# Altium PCB MainPCB.PcbDoc
Units mil, origin at the board's own origin, x right, y up, seen from the top; angles counter-clockwise.
Board outline 4810 x 6680 mil, 2 copper layers (Top Layer, Bottom Layer); 78 components, 77 nets, 281 pads, 54 vias.
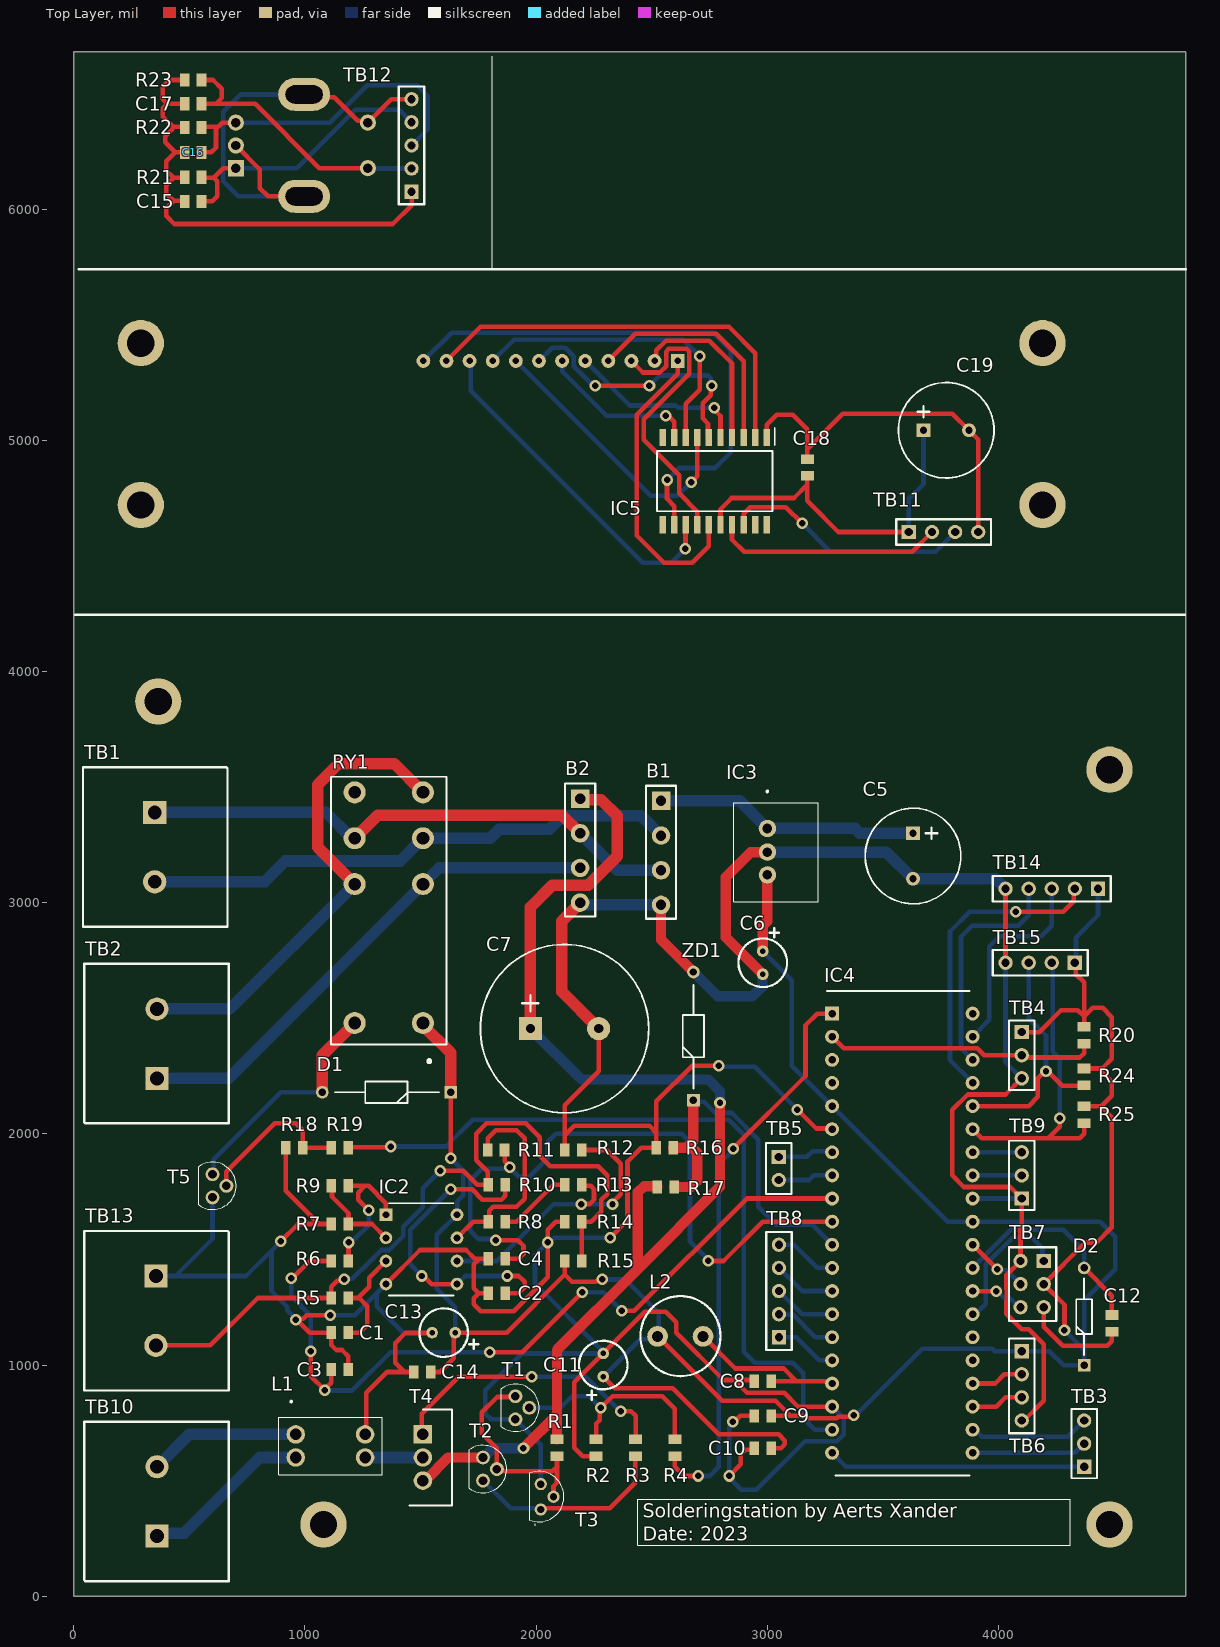
[diagram p0: Top Layer view]
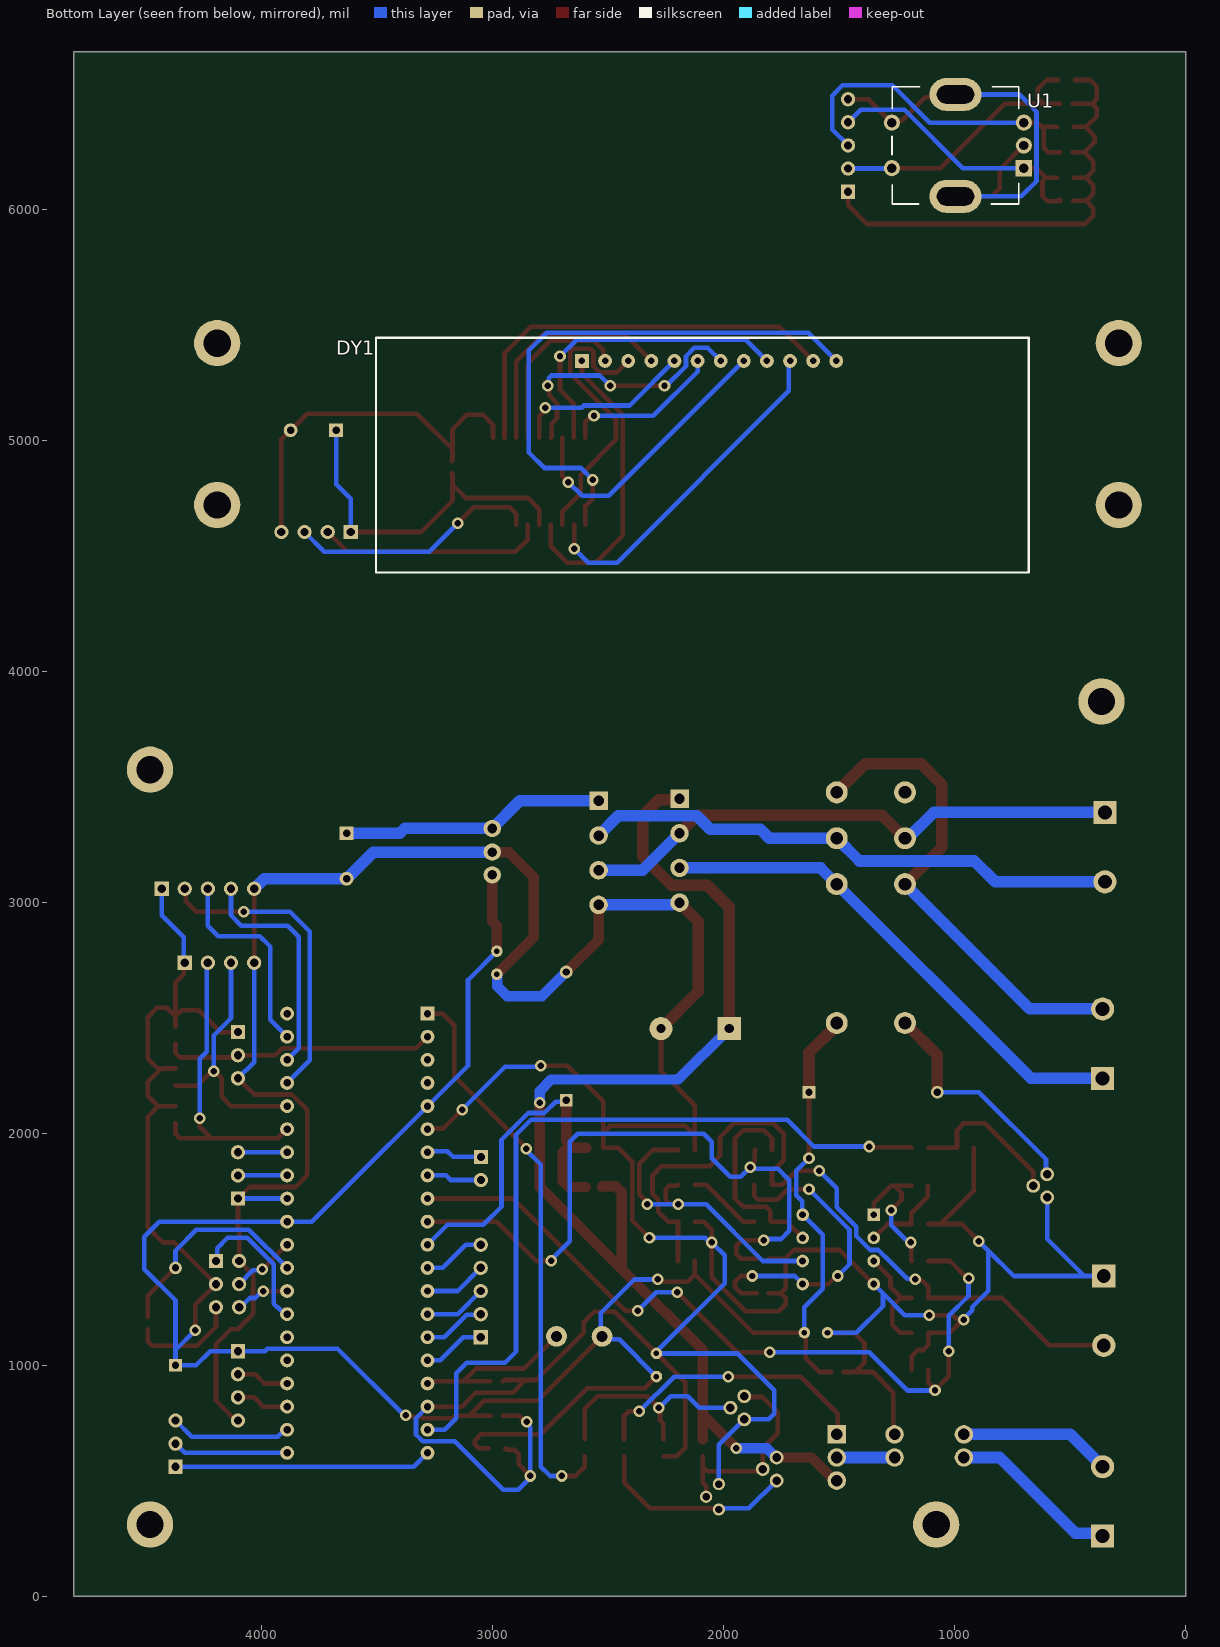
[diagram p1: Bottom Layer view, seen from below]

## Layer stack, top to bottom
Top Solder: solder mask 0.4, Solder Resist, Dk 3.5
Top Layer: signal copper 1.4
Dielectric 1: dielectric 12.6, FR-4, Dk 4.8
Bottom Layer: signal copper 1.4
Bottom Solder: solder mask 0.4, Solder Resist, Dk 3.5

## Board outline
0,0 4810,0 4810,6680 0,6680

## Design rules (kind name [scope] priority, off if disabled: settings)
Clearance [All] p1: gap=10 ignorepadtopadclearanceinfootprint=FALSE except(0: Arc-Hole Track-Hole SMDPad-Hole THPad-Hole Via-Hole Fill-Hole Poly-Hole Region-Hole Text-Hole)
HoleSize [All] p1: absolutevalues=TRUE maxlimit=200 minlimit=1 maxpercent=80.000 minpercent=20.000
PolygonConnect [All] p1: connectstyle=Relief reliefconductorwidth=10 reliefentries=4 polygonreliefangle="90 Angle" airgapwidth=10
RoutingVias [All] p1: holewidth=28 width=50 viastyle="Through Hole" minholewidth=28 minwidth=50 maxholewidth=28 maxwidth=50
SolderMaskExpansion [All] p1: expansion=4 istentingtop=FALSE
Width [All] p1: maxlimit=50 minlimit=20 preferedwidth=20 minimp=50.000000 maximp=50.000000 favimp=50.000000
29 further rules are at their usual default settings.

## Classes and differential pairs
component class Thermocouple: C1 C2 C3 C4 C13 C14 IC2 R5 R6 R7 R8 R9 R10 R11 R12 R13 R14 R15 TB13
component class PWM_control: L1 R1 R2 R3 R4 T1 T2 T3 T4 TB10
component class "Power supply": B1 B2 C5 C6 C7 D1 IC3 R16 R17 R18 R19 RY1 T5 TB1 TB2 ZD1
component class Display: C15 C16 C17 C18 C19 DY1 IC5 R21 R22 R23 TB11 TB12 U1
component class CPU: C8 C9 C10 C11 C12 D2 IC4 L2 R20 R24 R25 TB3 TB4 TB5 TB6 TB7 TB8 TB9 TB14 TB15

## Components (designator, comment, footprint, x,y, rotation, side; value= is the part's Value field where it differs from the comment)
B1 "Bruggelijkrichter" Bruggelijkrichter 2485,3380 r270 top
B2 "Bruggelijkrichter" Bruggelijkrichter 2135,3390 r270 top
C1 "10nF" 0805 1150,1140 r180 top value="10 nF"
C2 "10nF" 0805 1830,1310 r180 top value="10 nF"
C3 "10nF" 0805 1150,980 r0 top value="10 nF"
C4 "10nF" 0805 1830,1460 r180 top value="10 nF"
C5 "100uf" "100uf tht" 3630,3300 r270 top
C6 "10uf" "10uF tht" 2980,2790 r270 top
C7 "4700uf" "4700uf tht" 1975,2455 r0 top
C8 "100nF" 0805 2980,930 r180 top value="10 nF"
C9 "100nF" 0805 2980,780 r180 top value="10 nF"
C10 "100nF" 0805 2980,640 r180 top value="10 nF"
C11 "10uF" "10uF tht" 2290,950 r90 top
C12 "100nF" 0805 4490,1180 r270 top value="10 nF"
C13 "10uF" "10uF tht" 1650,1140 r180 top
C14 "100n" 0805 1506.65,970 r180 top value="10 nF"
C15 "10nF" 0805 516,6033 r0 top value="10 nF"
C16 "10nF" 0805 516,6245 r0 top value="10 nF"
C17 "10nF" 0805 516,6455 r0 top value="10 nF"
C18 "100nF" 0805 3173,4882 r270 top value="10 nF"
C19 "100uF" "100uf tht" 3675.15,5043 r0 top
D1 "1N4007" 1n4007 1630,2180 r180 top
D2 "1N4148" 1n4148 4370,998.74 r90 top
DY1 "4 x sevensegment display" "4 x sevensegment display" 2292,5263 r180 bottom
IC2 "MCP6002-E/P" Dual_Opamp 1503.74,1500 r0 top
IC3 "OKI-78SR-5_1.5-W36-C" OKI-78SR-5_1.5-W36-C 3000,3320.79 r270 top
IC4 "ATMEGA4809-PF" ATMEGA4809-PF 3583.74,1570 r0 top
IC5 "TM1637__SOP_" sop 2772,4823 r270 top
L1 "CM2545X171B-10" CM2545X171B-10 960,700 r270 top
L2 "10uH" "10uH tht" 2710,1190 r180 top
R1 "1K" 0805 2090,641.87 r90 top
R2 "1K" 0805 2259,642 r90 top
R3 "1K" 0805 2430,642 r270 top
R4 "1K" 0805 2600,642 r270 top
R5 "1K" 0805 1150,1290 r0 top
R6 "1K" 0805 1150,1450 r0 top
R7 "1K" 0805 1150,1610 r0 top
R8 "1K" 0805 1830,1620 r0 top
R9 "1K" 0805 1150,1775 r180 top
R10 "1K" 0805 1830,1780 r180 top
R11 "1K" 0805 1826.42,1930 r180 top
R12 "1K" 0805 2160,1930 r0 top
R13 "1K" 0805 2160,1780 r0 top
R14 "1K" 0805 2160,1620 r0 top
R15 "1K" 0805 2160,1450 r180 top
R16 "1K" 0805 2556.42,1940 r0 top
R17 "1K" 0805 2560,1770 r180 top
R18 "1K" 0805 953.58,1940 r180 top
R19 "1K" 0805 1150,1940 r0 top
R20 "1K" 0805 4370,2426 r90 top
R21 "1K" 0805 516,6137 r180 top
R22 "1K" 0805 516,6353 r180 top
R23 "1K" 0805 516,6558 r180 top
R24 "1K" 0805 4370,2246 r90 top
R25 "1K" 0805 4370,2082.42 r90 top
RY1 "RT424005" RT424005 1362.36,2479.21 r90 top
T1 "BC547CG" BC547CG 1910,865 r90 top
T2 "BC547CG" BC547CG 1770,600 r90 top
T3 "BC557C" BC557C 2020,380 r90 top
T4 "IRF9Z34NPBF" IRF9Z34NPBF 1510,700 r270 top
T5 "BC547CG" BC547CG 600,1825 r90 top
TB1 "2pin screw connector" "2pin screw connector" 255,3335 r270 top
TB2 "2pin screw connector" "2pin screw connector" 455,2295 r90 top
TB3 "87224-3" "3x1 header tht" 4370,660 r90 top
TB4 "87224-3" "3x1 header tht" 4100,2340 r270 top
TB5 "TSW-102-07-L-S" "2x1 header tht" 3049,1850 r270 top
TB6 "4x1 header tht" "4x1 header tht" 4110,-17055 r270 top
TB7 "6x2 header tht" "6x2 header tht" 4180,1575 r270 top
TB8 "5x1 header tht" "5x1 header tht" 3100,1170 r90 top
TB9 "87224-3" "3x1 header tht" 4100,1820 r90 top
TB10 "2pin screw connector" "2pin screw connector" 455,315 r90 top
TB11 "4x1 header tht" "4x1 header tht" 21727,4613 r0 top
TB12 "5x1 header tht" "5x1 header tht" 1511,6125 r90 top
TB13 "2pin screw connector" "2pin screw connector" 260,1330 r270 top
TB14 "5x1 header tht" "5x1 header tht" 4380,3110 r180 top
TB15 "4x1 header tht" "4x1 header tht" -13785,2730 r180 top
U1 "Encoder" Encoder 996.28,6275 r90 bottom
ZD1 "5V1" 1n4007 2680,2144.88 r90 top

## Footprints (in the part's own frame and the unit in brackets; to place one, negate y for a bottom-side part, rotate by r counter-clockwise, add the part's x,y. Pads: shape width x height; smd on the part's side, far side on the other; paste and mask are expansions set on the pad)
1n4007 [mil]
  rect 55x55 hole 32: 1(0,0)
  round 55 hole 32: 2(555.12,0)
  silkscreen extent 50,-46 500,46
1n4148 [mil]
  rect 55x55 hole 32: 1(0,0)
  round 55 hole 32: 2(421.26,0)
  silkscreen extent 45,-34 375,34
"2pin screw connector" [mil]
  rect 100x100 hole 60: 1(-55,95)
  round 100 hole 60: 2(245,95)
  silkscreen extent -250,-215 440,410
"2x1 header tht" [mil]
  rect 62x62 hole 36 paste-39370.1 mask+0: 1(-50,0)
  round 62 hole 36 paste-39370.1 mask+0: 2(50,0)
  silkscreen extent -110,-55 110,55
"3x1 header tht" [mil]
  rect 62x62 hole 36 paste-39370.1 mask+0: 1(-100,0)
  round 62 hole 36 paste-39370.1 mask+0: 2(0,0) 3(100,0)
  silkscreen extent -150,-55 150,55
"4 x sevensegment display" [mil]
  rect 60x60 hole 28: 1(-320,80)
  round 60 hole 28: 2(-220,80) 3(-120,80) 4(-20,80) 5(80,80) 6(180,80) 7(280,80) 8(380,80) 9(480,80) 10(580,80) 11(680,80) 12(780,80)
  silkscreen extent -1211,-835 1612,180
"4x1 header tht" [mil]
  rect 62x62 hole 36: 1(-18115,-10)
  round 62 hole 36: 2(-18015,-10) 3(-17915,-10) 4(-17815,-10)
  silkscreen extent -18170,-65 -17760,45
"5x1 header tht" [mil]
  rect 62x62 hole 36: 1(-50,50)
  round 62 hole 36: 2(50,50) 3(150,50) 4(250,50) 5(350,50)
  silkscreen extent -105,-5 405,105
"6x2 header tht" [mil]
  rect 62x62 hole 36: 1(125,15)
  round 62 hole 36: 2(225,15) 3(325,15) 4(325,-85) 5(225,-85) 6(125,-85)
  silkscreen extent 65,-135 385,70
"10uF tht" [mil]
  round 50 hole 24: 1(0,0) 2(100,0)
  silkscreen extent -100,-105 155,105
"10uH tht" [mil] "10uH"
  round 90 hole 48: 1(-12,66) 2(185,66)
  silkscreen extent -87,-108 259,238
"100uf tht" [mil]
  rect 60x60 hole 32: 1(0,0)
  round 60 hole 32: 2(196.85,0)
  silkscreen extent -108,-207 305,207
0805 [mm] "Chip Resistor, 2-Leads, Body 2.00x1.25mm, IPC Medium Density"
  rect 1.05x1.45 smd: 1(-0.925,0) 2(0.925,0)
  body extent -1.1,-0.72 1.1,0.72, height 0.5
"4700uf tht" [mil] "CAPPRD750W80D1850H4150"
  rect 100x100 hole 40: 1(0,0)
  round 100 hole 40: 2(295.28,0)
  silkscreen extent -217,-364 512,364
ATMEGA4809-PF [mil]
  rect 60x60 hole 32: 1(-303.74,950)
  round 60 hole 32: 2(-303.74,850) 3(-303.74,750) 4(-303.74,650) 5(-303.74,550) 6(-303.74,450) 7(-303.74,350) 8(-303.74,250) 9(-303.74,150) 10(-303.74,50) 11(-303.74,-50) 12(-303.74,-150) 13(-303.74,-250) 14(-303.74,-350) 15(-303.74,-450) 16(-303.74,-550) 17(-303.74,-650) 18(-303.74,-750) 19(-303.74,-850) 20(-303.74,-950) 21(303.74,-950) 22(303.74,-850) 23(303.74,-750) 24(303.74,-650) 25(303.74,-550) 26(303.74,-450) 27(303.74,-350) 28(303.74,-250) 29(303.74,-150) 30(303.74,-50) 31(303.74,50) 32(303.74,150) 33(303.74,250) 34(303.74,350) 35(303.74,450) 36(303.74,550) 37(303.74,650) 38(303.74,750) 39(303.74,850) 40(303.74,950)
  silkscreen extent -327,-1047 290,1047, body extent -309,-1019 309,1019, height 250
BC547CG [mil]
  round 60 hole 37: 1(0,0) 2(-50,-60) 3(-100,0)
  silkscreen extent -152,-102 52,60, body extent -152,-94 52,70, height 328
BC557C [mil]
  round 53 hole 32: 1(-5,0) 2(50,-55) 3(105,0)
  silkscreen extent -73,-100 160,48
Bruggelijkrichter [mil] "D6KB6U"
  rect 80x80 hole 45: 1(-60,55)
  round 80 hole 45: 2(90,55) 3(240,55) 4(390,55)
  silkscreen extent -125,-10 450,120
CM2545X171B-10 [mil]
  round 80 hole 50: 1(0,0) 2(100,0) 3(100,300) 4(0,300)
  silkscreen extent -146,-74 174,374, body extent -74,-74 174,374, height 378
Dual_Opamp [mil] "Opamp"
  rect 55x55 hole 30: 1(-153.74,150)
  round 55 hole 30: 2(-153.74,50) 3(-153.74,-50) 4(-153.74,-150) 5(153.74,-150) 6(153.74,-50) 7(153.74,50) 8(153.74,150)
  silkscreen extent -140,-200 140,200
Encoder [mil]
  round 70 hole 40 paste-39370.1 mask+0: 1(-98.43,275.59) 2(98.43,275.59) B(98.43,-295.28) C(0,-295.28)
  rrect100% 142x225 hole 161.42 slot 78.74 at 0 deg paste-39370.1 mask+0: 3(-220.47,0) 4(220.47,0)
  rect 70x70 hole 40 paste-39370.1 mask+0: A(-98.43,-295.28)
  silkscreen extent -254,-274 254,275
IRF9Z34NPBF [mil]
  rect 80x80 hole 50: 1(0,0)
  round 80 hole 50: 2(100,0) 3(200,0)
  silkscreen extent -107,-59 307,126, body extent -105,-59 305,126, height 742
OKI-78SR-5_1.5-W36-C [mil]
  round 75 hole 42: 1(0,0) 2(102.36,0) 3(200.79,0)
  silkscreen extent -162,-146 317,220, body extent -112,-146 317,220, height 654
RT424005 [mil]
  round 95 hole 55: 1(0,-147.64) 2(600.79,-147.64) 3(799.21,-147.64) 4(997.64,-147.64) 5(997.64,147.64) 6(799.21,147.64) 7(600.79,147.64) 8(0,147.64)
  silkscreen extent -170,-250 1065,250, body extent -87,-250 1055,250, height 624
sop [mm]
  rect 1.9x0.7 smd: 1(-4.8,5.715) 2(-4.8,4.445) 3(-4.8,3.175) 4(-4.8,1.905) 5(-4.8,0.635) 6(-4.8,-0.635) 7(-4.8,-1.905) 8(-4.8,-3.175) 9(-4.8,-4.445) 10(-4.8,-5.715) 11(4.8,-5.715) 12(4.8,-4.445) 13(4.8,-3.175) 14(4.8,-1.905) 15(4.8,-0.635) 16(4.8,0.635) 17(4.8,1.905) 18(4.8,3.175) 19(4.8,4.445) 20(4.8,5.715)
  silkscreen extent -5.84,-6.35 3.3,6.6, body extent -5.23,-6.35 5.23,6.35, height 2.8

## Part data
C1 C2 C3 C4 C8 C9 C10 C12 C14 C15 C16 C17 C18: library part "Capacitor 0805", "CAP CER 10000PF 50V X7R 0603", Capacitance="10 nF", Manufacturer=YAGEO, Manufacturer Part Number=CC0603KRX7R9BB103, Package=CC0603-DA, Temperature="-55°C to +125°C", Temperature Characteristic=X7R, Temperature Coefficient=15%, Temperature Range High=+125°C, Temperature Range Low=-55°C, Tolerance=0.1, Voltage="50 V", Automotive=No, Category=Cap, ComponentLink2Description=Datasheet, ComponentLink2URL=http://www.yageo.com/documents/recent/UPY-GPHC_X7R_6.3V-to-50V_18.pdf, Device Class L1="Passive Components", Device Class L2=Capacitors, Device Class L3="Ceramic Capacitors", Digikey Description="CAP CER 10000PF 50V X7R 0603", Footprint Url=http://www.yageo.com/exep/pages/download/literatures/UPY-C_GEN_24.pdf, Height=0.9mm, Lead Free=Yes, Material=Ceramic, Mouser Description="Multilayer Ceramic Capacitor, CC Series, 0.01 - F, - 10%, X7R, 50 V, 0603 [1608 Metric]", Octopart=https://octopart.com/cc0603krx7r9bb103-yageo-192938, RoHS=TRUE, Voltage Rating="50 V"
C5 C19: library part "100uf tht", "Aluminum Electrolytic Capacitors - Radial Leaded 50V 100uF 20%-MAL213631101E3", Manufacturer_Name=Vishay, Manufacturer_Part_Number=MAL213631101E3, Mouser Part Number=594-MAL213631101E3, Datasheet Link=https://componentsearchengine.com/Datasheets/2/MAL213631101E3.pdf, Geometry.Height=13.5mm, Mouser Price/Stock=https://www.mouser.co.uk/ProductDetail/Vishay-BC-Components/MAL213631101E3?qs=aJI9t0tCUiXeynxOmA%252BOhg%3D%3D
C6: library part "10uF tht", "10uF"
C7: library part "4700uf tht", "Cap Aluminum Lytic 4700uF 50V 20% (18 X 40mm) Radial 7.5mm 2800mA 2000h 85C Bulk", Manufacturer_Name=Rubycon, Manufacturer_Part_Number=50PK4700MEFC18X40, Mouser Part Number=232-50PK4700MEFC18X4, Datasheet Link=http://www.rubycon.co.jp/en/catalog/e_pdfs/aluminum/e_pk.pdf, Geometry.Height=41.5mm, Mouser Price/Stock=https://www.mouser.co.uk/ProductDetail/Rubycon/50PK4700MEFC18X40?qs=T3oQrply3y8fu7oTpkJ7DA%3D%3D
C11 C13: library part "10uF tht"
D1: "Switching diode with a peak reverse voltage of 1 kV, a maximum forward current of 1 A, and a peak repetitive forward current of 5.4 A", Manufacturer_Name=Diotec, Mouser Part Number=637-1N4007, Datasheet Link=https://diotec.com/tl_files/diotec/files/pdf/datasheets/1n4001.pdf, Manufacturer_Part_Number=1N4007, Mouser Price/Stock=https://www.mouser.co.uk/ProductDetail/Diotec-Semiconductor/1N4007?qs=OlC7AqGiEDmK9mU1uTiCkg%3D%3D
D2: "Small Signal Diode, 100V 0.3A 2-Pin DO35", Manufacturer_Name=onsemi, Mouser Part Number=512-1N4148, Manufacturer_Part_Number=1N4148, Mouser Price/Stock=https://www.mouser.co.uk/ProductDetail/onsemi-Fairchild/1N4148?qs=i4Fj9T%2FoRm8RMUhj5DeFQg%3D%3D
IC2: library part Dual_Opamp
IC3: "Power Supply", Arrow Part Number=OKI-78SR-5/1.5-W36-C, Manufacturer_Name="Murata Electronics", Mouser Part Number=580-OKI78SR5/1.5W36C, Arrow Price/Stock=https://www.arrow.com/en/products/oki-78sr-51.5-w36-c/murata-power-solutions?region=nac, Datasheet Link=https://www.murata.com/products/productdata/8807037992990/oki-78sr.pdf?1583754815000, Height=16.5mm, Manufacturer_Part_Number=OKI-78SR-5/1.5-W36-C, Mouser Price/Stock=https://www.mouser.co.uk/ProductDetail/Murata-Power-Solutions/OKI-78SR-5-1.5-W36-C?qs=uJpRT2lXVNXJP%252Bo08dQqJQ%3D%3D
IC4: "Integrated Circuit", Manufacturer_Name=Microchip, Mouser Part Number=556-ATMEGA4809-PF, Datasheet Link=http://ww1.microchip.com/downloads/en/DeviceDoc/40-pin-Data-Sheet-megaAVR-0-series-DS40002104A.pdf, Height=6.35mm, Manufacturer_Part_Number=ATMEGA4809-PF, Mouser Price/Stock=https://www.mouser.co.uk/ProductDetail/Microchip-Technology-Atmel/ATMEGA4809-PF?qs=T3oQrply3y9UlpZbCygk%252BQ%3D%3D
IC5: "Integrated Circuit", Manufacturer_Name="TITAN MICRO ELECTRONICS", Manufacturer_Part_Number="TM1637 (SOP)", Datasheet Link=https://www.mcielectronics.cl/website_MCI/static/documents/Datasheet_TM1637.pdf, Height=2.8mm
L1: "Transformer", Manufacturer_Name="Laird Technologies", Mouser Part Number=N/A, Arrow Part Number=CM2545X171B-10, Arrow Price/Stock=https://www.arrow.com/en/products/cm2545x171b-10/laird-technologies, Datasheet Link=https://datasheet.datasheetarchive.com/originals/dk/DKDS-7/122753.pdf, Height=9.5mm, Manufacturer_Part_Number=CM2545X171B-10, Mouser Price/Stock=https://www.mouser.co.uk/ProductDetail/Laird/CM2545X171B-10?qs=PzGy0jfpSMtNfkEypgU65A%3D%3D
L2: library part "10uH tht"
R1 R2 R3 R4 R5 R6 R7 R8 R9 R10 R11 R12 R13 R14 R15 R16 R17 R18 R19 R20 R21 R22 R23 R24 R25: library part resistor, Manufacturer="Vishay Dale", Part Number=CRCW08050000Z0EA
RY1: "Relay or Contactor", Manufacturer_Name="TE Connectivity", Mouser Part Number=655-RT424005, Arrow Part Number=RT424005, Arrow Price/Stock=https://www.arrow.com/en/products/rt424005/te-connectivity?region=nac, Datasheet Link=https://www.te.com/commerce/DocumentDelivery/DDEController?Action=showdoc&DocId=Data+Sheet%7FRT2%7F1014%7Fpdf%7FEnglish%7FENG_DS_RT2_1014.pdf%7F5-1393243-9, Manufacturer_Part_Number=RT424005, Mouser Price/Stock=https://www.mouser.co.uk/ProductDetail/TE-Connectivity-Schrack/RT424005?qs=KKrrU%252BaSadKRsQcVuAjnsQ%3D%3D
T1 T2 T5: "Transistor BJT NPN", Manufacturer_Name=onsemi, Mouser Part Number=863-BC547CG, Arrow Part Number=BC547CG, Arrow Price/Stock=https://www.arrow.com/en/products/bc547cg/on-semiconductor?region=nac, Datasheet Link=https://www.onsemi.com/pub/Collateral/BC546-D.PDF, Height=5.33mm, Manufacturer_Part_Number=BC547CG, Mouser Price/Stock=https://www.mouser.co.uk/ProductDetail/onsemi/BC547CG?qs=vLkC5FC1VN%252BHx9C8w0tCew%3D%3D
T3: "Transistor BJT PNP", Manufacturer_Name=NXP, Mouser Part Number=771-BC557C, Datasheet Link=http://uk.rs-online.com/web/p/products/1124775, Height=5.2mm, Manufacturer_Part_Number=BC557C, Mouser Price/Stock=https://www.mouser.co.uk/ProductDetail/NXP-Semiconductors/BC557C?qs=84A%2FDAdkstLO1yR4NjQrgg%3D%3D
T4: "MOSFET (P-Channel)", Manufacturer_Name=Infineon, Mouser Part Number=942-IRF9Z34NPBF, Arrow Part Number=IRF9Z34NPBF, Arrow Price/Stock=https://www.arrow.com/en/products/irf9z34npbf/infineon-technologies-ag?region=nac, Datasheet Link=https://www.infineon.com/dgdl/irf9z34npbf.pdf?fileId=5546d462533600a40153561220af1ddd, Height=4.69mm, Manufacturer_Part_Number=IRF9Z34NPBF, Mouser Price/Stock=https://www.mouser.co.uk/ProductDetail/Infineon-Technologies/IRF9Z34NPBF?qs=9%252BKlkBgLFf16a%2FvlD%252BMCtQ%3D%3D
TB3 TB4 TB9: library part "3x1 header tht", "CONN HEADER VERT 3POS 2.54MM", Color=Black, Contact Current Rating=3A, Flammability Rating="UL94 V-0", High Temperature Housing=No, Max Operating Temperature=105°C, Min Operating Temperature=-65°C, Package Quantity=520, Approvals=CSA, Board Standoff="No (Without)", Connector Type=Plug, Contact Gender=Male, Contact Material=Bronze, Contact Mating Length=8.08mm, Contact Plating=Gold, Contact Post Length=0.125inch, Contact Protection="No (Without)", Contact Shape=Square, Contact Type="Male Pin", Current Rating=3A, Depth=2.54mm, ELV=Compliant, Gasket="No (Without)", High Speed Serial Data Connector=No, Housing Color=Black, Housing Material=Thermoplastic, Keyed=No, Lead Free="Lead Free", Length=7.21mm, Mating Alignment="No (Without)", Mating Connector Lock="No (Without)", Mount="Through Hole", Number of Contacts=3, Number of Positions=3, Number of Rows=1, Orientation=Straight, Packaging=Carton, PCB Mount Retention=Without, PCB Mounting Orientation=Vertical, PCB Thickness=1.397mm, Pitch=2.54mm, Radiation Hardening=No, RoHS Compliant=Yes, Row Spacing=2.54mm, Selectively Loaded="No (Without)", Series="AMPMODU MOD II", Stabilizers="No (Without)", Strain Relief="No (Without)", Termination="Through Hole"
TB5: library part "2x1 header tht", "CONN HEADER VERT 2POS 2.54MM", Color=Black, Current Rating=7.6A, Max Operating Temperature=125°C, Max Voltage Rating (AC)=550V, Min Operating Temperature=-55°C, Package Quantity=1, Connector Type="Male Pin", Contact Material=Bronze, Contact Mating Length=0.23inch, Contact Plating=Gold, Contact Type="Male Pin", Depth=2.54mm, Gender=Male, Housing Color=Black, Housing Material=Polyester, Lead Free="Lead Free", Length=5.08mm, Max Current Rating=7.6A, Mount="Through Hole", Number of Contacts=2, Number of Positions=2, Number of Rows=1, Orientation=Straight, Packaging=Bulk, Pitch=2.54mm, Radiation Hardening=No, REACH SVHC="No SVHC", RoHS Compliant=Yes, Series=TSW, Termination=Solder, Voltage Rating=550V, Width=2.54mm
ZD1: library part "Zener 5.1 volt"

## Free pads (board coordinates)
  round 200 hole 118.11: 29(290,5420) 30(290,4720) 31(4190,4720) 32(4190,5420) 33(1080,310) 34(4480,310) 35(4480,3575) 36(365,3870)

## Via types
v1: diameter 50, hole 28, Top Layer to Bottom Layer, 54 vias

## Nets (pads, with @x,y where several pads share a name; then routed paths per layer and width w, separated by ;. In a path a pad name is that pad's centre, name@x,y a point inside that pad or via, vN(x,y) a via of type N, cw(c..) or ccw(c..) an arc to the next point about the centre after c; other vN are vias at no path point)
+5: C6.1 C9.1 C10.1 C11.1 C13.1 C14.1 D1.1 D2.1 IC2.8 IC3.3 IC4.5 IC4.31 L2.2 R15.2 R20.2 R24.2 R25.2 RY1.1 TB4.1 TB6.1 TB7.2 TB14.1 TB15.1 | length 12720.1
  Top Layer w20: C14.1@1533.31,970 1585,970 1643.77,1028.77 1643.77,1113.28 1644.26,1113.78 1644.26,1134.26 C13.1 1872.13,1140 2123.58,1391.46 ; v1(1630,1895) D1.1 ; R15.2 2123.58,1391.46 ; v1(2285,1370) 2279.26,1364.26 2262.54,1364.26 2258.28,1360 2155.04,1360 2123.58,1391.46 ; C11.1 2340,900 2590,900 2790,700 3049,700 3075.72,673.28 3075.72,656.72 3059,640 C10.1 ; L2.2 2804,845 3035,845 3100,780 ; C9.1@3006.65,780 3100,780 ; v1(3373.32,782.18) 3367.58,776.43 3307.15,776.43 3300.71,770 3172.84,770 3162.84,780 3100,780 ; TB4.1 4175,2440 4270,2535 4342.5,2535 4370,2507.5 ; v1(4285,1150) 4285,1260 TB7.2 4375,1530 4425,1530 4490,1595 4490,2072.67 4443.84,2118.84 ; TB15.1 4334.28,2735.72 4334.28,2690.72 4370,2655 4370,2507.5 ; R25.2 4443.84,2118.84 ; R24.2 4432.58,2282.42 ; R20.2 4370,2507.5 ; 4370,2507.5 4407.5,2545 4450,2545 4490,2505 4490,2325 4447.42,2282.42 4432.58,2282.42 ; 4432.58,2282.42 4490,2225 4490,2165 4443.84,2118.84
  Top Layer w45: C6.1 2980,2900 3000,2920 IC3.3
  Top Layer w50: RY1.1 1510,2470 1630,2350 D1.1
  Bottom Layer w20: v1(1630,1895) 1685,1840 1685,1733.5 1659,1707.5 1659,1651.52 IC2.8 1570,1562.52 1570,1330 1650,1250 C13.1 ; v1(2285,1370) 2385,1370 2530,1225 2530,1129 L2.2 2511.61,1110.61 2450.61,1110.61 C11.1 ; C6.1 3105,2665 3105,2295 3780,1620 IC4.31 4440,1620 4505,1555 4505,1415 4370,1280 4370,1065 ; v1(3373.32,782.18) 3381.44,782.18 3669.26,1070 3972.88,1070 3982.88,1060 TB6.1 4220,1060 4281.26,998.74 D2.1 4370,1065 ; v1(4285,1150) 4370,1065 ; TB15.1 4335,2745 4335,2850 4430,2945 TB14.1
GND: B1.4 B2.4 C1.2 C2.2 C3.2 C4.2 C5.2 C6.2 C7.2 C8.2 C9.2 C10.2 C11.2 C13.2 C14.2 IC2.4 IC3.2 IC4.6 IC4.18 IC4.32 L1.4 R2.1 R7.1 R12.1 R14.1 R16.1 R18.2 T1.3 T3.3 T5.3 TB4.3 TB6.4 TB7.6 TB9.1 TB13.1 TB14.5 TB15.4 ZD1.2 | length 20063.2
  Top Layer w20: v1(895,1535) 970,1610 R7.1 ; R18.2 917.16,1752.84 1057.5,1612.5 ; v1(960,1195) 965.74,1200.74 992.99,1200.74 1007.25,1215 v1(1110,1215) ; v1@971.39,1188.61 1020,1140 C1.2 1113.58,1086.42 1135,1065 1160,1065 1186.42,1038.58 C3.2 ; L1.4 1265,705 1265,880 1355,970 1430,970 ; IC2.4 1497.5,1497.5 1696.41,1497.5 1733.91,1460 1753.74,1460 ; C14.2@1480,970 1430,970 ; C13.2 1548.61,1138.61 1433.61,1138.61 1390,1095 1390,1010 1430,970 ; C2.2@1803.35,1310 1751.72,1310 ; C4.2@1803.35,1460 1753.74,1460 ; R14.1 2123.21,1619.63 2084.63,1619.63 2050,1585 v1(2050,1530) 2050,1380 1903,1233 1760,1233 1730,1263 1730,1288.28 1751.72,1310 ; R12.1 2123.58,1993.58 ; R2.1 2258.58,606 2202,606 2165,643 2165,925 C11.2 2470,1230 2560,1230 2605,1185 2605,1140 2810,935 2856.72,935 ; C7.2 2270.28,2270.28 2123.58,2123.58 2123.58,1993.58 ; v1(2320,1550) 2395,1625 2395,1880 2455,1940 R16.1 2520,2005 ; v1(2790,2295) 2675,2295 2520,2140 2520,2005 ; v1(2835,520) 2885,570 2885,614 2904.63,633.63 2937.21,633.63 C10.2 ; v1(2850,755) 2858.12,755 2883.12,780 C9.2@2953.35,780 ; C8.2@2953.35,930 2948.35,935 2856.72,935 ; v1(3130,2105) 3211.88,2023.12 3276.88,2023.12 IC4.6 ; IC4.18 3132.43,820 3072.43,880 2911.72,880 2856.72,935 ; TB15.4 TB14.5 ; TB6.4 4110,760 4195,845 4195,1090 4130,1155 4100,1155 4034,1221 4034,1277.75 4035.12,1278.88 4035.12,1327.75 4034,1328.88 4034,1390.36 4035.36,1390.36 TB7.6 4095,1590 4100,1595 TB9.1 4050,1770 3850,1770 3800,1820 3800,2103.23 3866.77,2170 4030,2170 TB4.3 ; 1751.72,1310 1730,1331.72 1730,1436.26 1753.74,1460 ; 2123.58,1993.58 2165,2035 2490,2035 2520,2005
  Top Layer w45: B1.4 2540,2840 ZD1.2 ; C6.2 2820,2850 2820,3110 2928.43,3218.43 IC3.2
  Top Layer w50: B2.4 2110,2920 2110,2615.28 C7.2
  Bottom Layer w20: TB13.1 440,1385 ; T5.3 600,1545 440,1385 ; v1(895,1535) 855,1495 ; v1(960,1195) 960,1200.86 924.04,1236.82 924.04,1250.96 855,1320 855,1495 ; v1(1110,1215) 1215,1215 1310,1310 ; IC2.4 1310,1310 ; C13.2 1425,1140 1310,1255 1310,1310 ; T3.3@2020,480 2020,655 T1.3 1805,765 1780,790 1780,890 1940,1050 C11.2 2290,1057.43 1995,1352.43 1995,1475 v1(2050,1530) 2058.12,1530 2078.12,1550 v1(2320,1550) ; v1(2790,2295) 2795,2290 2945,2290 v1(3130,2105) ; v1@2835,511.88 2886.88,460 2952.57,460 3162.57,670 3300.71,670 3330,699.29 3330,770 IC4.18 ; v1(2835,520) 2835,731.88 2850,746.88 v1(2850,755) ; IC4.32 TB9.1 ; TB15.4 4030,2310 TB4.3 ; 440,1385 745,1385 855,1495
  Bottom Layer w45: ZD1.2 2785,2595 2935,2595 2979.04,2639.04 2979.04,2689.04 C6.2
  Bottom Layer w50: B2.4 2195.74,2994.26 2216.95,2994.26 2221.21,2990 B1.4 ; IC3.2 3514.72,3218.43 C5.2 3986.85,3103.15 TB14.5 ; IC4.6 IC4.6@3281.91,2021.91
NetB1_1: B1.1 C5.1 IC3.1 | length 1148
  Bottom Layer w50: B1.1 2880.79,3440 IC3.1 3379.21,3320.79 3400,3300 C5.1
NetB1_2: B1.2 RY1.3 TB1.2 | length 2343
  Bottom Layer w50: TB1.2@350.22,3090 825,3090 915,3180 1411.58,3180 RY1.3 1801.42,3278.42 1840,3317 2057,3317 2115,3375 2455,3375 B1.2
NetB1_3: B1.3 B2.2 RY1.6 TB1.1 | length 2320.1
  Top Layer w50: RY1.6 1314.3,3378 2112,3378 B2.2
  Bottom Layer w50: 405.97,3390 1090.97,3390 1202.55,3278.42 RY1.6 ; B2.2 2350,3140 B1.3
NetB2_1: B2.1 C7.1 R1.2 R17.2 T2.1 T4.3 | length 5213.4
  Top Layer w45: T4.3 1519.63,500 1619.63,600 T2.1 ; v1(1945,640) 2090,785 ; R1.2 2090,785 ; R17.2 2523.58,1770.95 2521.75,1772.78 2466.36,1772.78 2440,1746.42 2440,1415 ; v1(2795,2135) 2795,1770 2440,1415 ; 2090,785 2090,1065 2440,1415
  Top Layer w50: C7.1 1975,2980 2070,3075 2225,3075 2350,3200 2350,3375 2280.36,3444.64 2195.36,3444.64 B2.1
  Bottom Layer w45: T2.1 1773.16,600 1813.16,640 v1(1945,640) ; C7.1 2195,2235 2745,2235 2795,2185 v1(2795,2135)
NetB2_3: B2.3 RY1.2 TB2.1 | length 2206.9
  Bottom Layer w50: TB2.1 670,2240 1580,3150 B2.3
NetC1_1: C1.1 IC2.3 R5.2 | length 484.6
  Top Layer w20: C1.1 1235,1140 1270,1175 1270,1255 1235,1290 R5.2 ; 1230.45,1291.05 1277.79,1338.39 1277.79,1377.79 IC2.3
NetC2_1: C2.1 IC2.5 R10.1 | length 1390.5
  Top Layer w20: v1(1505,1385) 1512.78,1385 1547.78,1350 IC2.5 ; v1(1630,1760) 1722.57,1760 1767.57,1715 1850,1715 1866.42,1731.42 R10.1 ; C2.1@1856.65,1310 1922.92,1310 1950,1337.08 1950,1360 1925,1385 v1(1875,1385)
  Bottom Layer w20: v1(1505,1385) 1455,1435 1455,1585 v1(1630,1760) ; IC2.5 1692.48,1385 v1(1875,1385)
NetC3_1: C3.1 IC4.9 R6.1 | length 3464.7
  Top Layer w20: v1(940,1375) 945,1375 1020,1450 R6.1 ; v1(1025,1060) 1025,951.92 v1@1085,891.92 ; v1(1085,890) v1@1085,891.92 ; C3.1 1113.58,923.58 1085,895 v1@1085,891.92 ; v1(1800,1055) 1940,1055 v1(2200,1315) ; v1(2370,1235) 2425,1235 2910,1720 IC4.9
  Bottom Layer w20: v1(940,1375) 940,1298.64 1025,1213.64 v1(1025,1060) ; v1@1075,890 v1(1085,890) 1205,890 1370,1055 v1(1800,1055) ; v1(2200,1315) 2290,1315 v1(2370,1235)
NetC4_1: C4.1 IC4.10 R11.1 | length 2967.8
  Top Layer w20: v1(1825,1540) 1920,1540 1945,1515 1945,1480 1925,1460 C4.1@1856.65,1460 ; R11.1 1863.92,1928.92 1863.92,1880.57 1885,1859.49 v1(1885,1855) ; v1(2745,1450) 2810,1450 2980,1620 IC4.10
  Bottom Layer w20: v1(1825,1540) 1820,1545 1750,1545 1715,1580 1715,1800 1764.26,1849.26 1879.26,1849.26 v1(1885,1855) 1925,1815 1970,1815 2050,1895 2050,1965 2085,2000 2630,2000 2665,1965 2665,1535 2745,1455 v1(2745,1450)
NetC8_1: C8.1 IC4.17 L2.1 | length 758
  Top Layer w20: L2.1 2861,985 3070,985 3125,930 ; C8.1@3009.53,930 3125,930 ; IC4.17 3272.35,927.65 3250.63,927.65 3248.28,930 3125,930
NetC12_1: C12.1 D2.2 IC4.29 | length 926.2
  Top Layer w20: D2.2 4490,1300 C12.1@4490,1206.65
  Bottom Layer w20: IC4.29 4052.48,1585 4280,1585 4370,1495 D2.2
NetC12_2: C12.2 TB7.3 | length 472.6
  Top Layer w20: TB7.3 4195,1165 4277,1083 4470,1083 4490,1103 C12.2@4490,1153.35
NetC15_1: C15.1 C16.1 C17.1 R21.2 R22.2 R23.2 TB12.1 | length 2253.4
  Top Layer w20: 427.13,6347.13 395,6315 395,6289.07 438.36,6245.71 400,6207.35 400,6166.72 431.72,6135 ; 445,6245 C16.1@489.35,6245 ; R23.2 413,6558 385,6530 385,6475 405,6455 ; R21.2@484.58,6135 445,6135 431.72,6135 ; R22.2@484.58,6355 430,6355 385,6400 385,6435 405,6455 ; C15.1@487.69,6035 445,6035 431.72,6035 ; C17.1@489.35,6455 478.52,6455 430,6455 420,6455 405,6455 ; TB12.1 1461,6016 1380,5935 435,5935 400,5970 400,6003.28 431.72,6035 ; 431.72,6035 400,6066.72 400,6103.28 431.72,6135
NetC15_2: C15.2 R21.1 TB12.4 U1.A | length 1219.3
  Top Layer w20: C15.2@541,6035 C15.2@547.11,6041.11 ; C15.2 598,6033 620,6055 620,6120 605,6135 ; R21.1@557.42,6135 570,6135 605,6135 ; U1.A 646.57,6176.57 605,6135
  Bottom Layer w20: U1.A 964.57,6176.57 1217,6429 1407,6429 TB12.4
NetC16_2: C16.2 R22.1 TB12.3 U1.B | length 1480
  Top Layer w20: C16.2@542.65,6245 595,6245 615,6265 615,6355 ; R22.1@557.42,6355 624,6355 642.43,6373.43 U1.B
  Bottom Layer w20: U1.B 1107.43,6373.43 1269,6535 1485,6535 1530,6490 1530,6344 TB12.3
NetC17_2: C17.2 R23.1 TB12.2 U1.1 | length 1213
  Top Layer w20: C17.2@542.65,6455 615,6455 ; R23.1 602,6558 640,6520 640,6480 615,6455 ; U1.1 1062.43,6176.57 784,6455 615,6455
  Bottom Layer w20: U1.1 1273.44,6175 TB12.2
NetC18_1: C18.1 C19.2 IC5.1 TB11.4 | length 1663.1
  Top Layer w20: IC5.1 2997,5067 3040,5110 3110,5110 3172,5048 3172,4960.5 ; C18.1@3175,4910 3172,4913 3172,4960.5 ; TB11.4 3912,5003 C19.2 3800,5115 3326.5,5115 3172,4960.5
NetC18_2: C18.2 C19.1 IC5.16 TB11.1 | length 1568.5
  Top Layer w20: IC5.16 2797,4702 2845,4750 3115,4750 3172,4807 ; C18.2@3175,4856.69 3172,4853.69 3172,4807 ; TB11.1 3307,4603 3185,4725 3172,4738 3172,4807
  Bottom Layer w20: TB11.1 3612,4747 3675.15,4810.15 C19.1
NetD1_2: D1.2 RY1.8 T5.1 | length 1014.2
  Top Layer w50: D1.2 1074.88,2339.37 RY1.8
  Bottom Layer w20: T5.1 605,1830 605,1890 895,2180 D1.2
NetDY1_1: DY1.1 IC5.15 | length 1311.2
  Top Layer w20: DY1.1 2612,5287 2435,5110 2435,4587.72 2552.72,4470 2675,4470 2747,4542 IC5.15
NetDY1_2: DY1.2 IC5.4 | length 753.8
  Top Layer w20: DY1.2 2519.65,5350.65 2519.65,5388.36 2561.29,5430 2749.05,5430 2847,5332.05 IC5.4
NetDY1_3: DY1.3 IC5.14 | length 1281.8
  Top Layer w20: DY1.3 2462,5293 2535,5293 2562,5320 2562,5383.28 2573.72,5395 2650.28,5395 2662,5383.28 2662,5287 2465,5090 2465,5002.22 2618.02,4849.2 2618.02,4770.22 2697,4691.24 IC5.14
NetDY1_4: DY1.4 IC5.3 | length 1011.8
  Top Layer w20: DY1.4 2429,5460 2778,5460 2897,5341 IC5.3
NetDY1_5: DY1.5 IC5.5 | length 782.7
  Top Layer w20: v1(2770,5140) 2770,5131.88 2797,5104.88 IC5.5 IC5.5@2796,5012.98
  Bottom Layer w20: DY1.5 2405,5150 2603.64,5150 2613.64,5140 v1(2770,5140)
NetDY1_6: DY1.6 IC5.9 | length 688.5
  Top Layer w20: v1(2560,5105) 2565.74,5099.26 2577.12,5099.26 2597,5079.38 IC5.9
  Bottom Layer w20: DY1.6 2112,5297 2304,5105 v1(2560,5105)
NetDY1_7: DY1.7 IC5.6 | length 1172.5
  Top Layer w20: v1(2255,5235) v1(2490,5235) ; IC5.6 2746,5010.98 2743.22,5013.76 2743.22,5071.78 2720,5095 2720,5160 2754.26,5194.26 2754.26,5229.26 v1(2760,5235)
  Bottom Layer w20: DY1.7 2069,5400 2125.71,5400 2162,5363.71 2162,5320 2247,5235 v1(2255,5235) ; v1(2490,5235) 2535,5280 2743.79,5280 2755.5,5268.28 2755.5,5239.5 v1(2760,5235)
NetDY1_8: DY1.8 IC5.7 | length 1229.3
  Top Layer w20: v1(2671,4819) 2697,4845 IC5.7
  Bottom Layer w20: DY1.8 2495.8,4759.2 2611.2,4759.2 v1(2671,4819)
NetDY1_9: DY1.9 IC5.8 | length 1338.8
  Top Layer w20: IC5.8 2647,5158 2707,5218 v1(2707,5363)
  Bottom Layer w20: DY1.9 1904,5435 2635,5435 v1(2707,5363)
NetDY1_10: DY1.10 IC5.13 | length 1497.5
  Top Layer w20: v1(2645,4530) 2646,4531 2646,4633.02 IC5.13
  Bottom Layer w20: DY1.10 1716.93,5338.07 1716.93,5213.07 2460,4470 2585,4470 v1(2645,4530)
NetDY1_11: DY1.11 IC5.2 | length 1807.7
  Top Layer w20: DY1.11 1759,5490 2834,5490 2947,5377 IC5.2
NetDY1_12: DY1.12 IC5.12 | length 2385.5
  Top Layer w20: v1(2566,4828) 2566,4746 2597,4715 IC5.12
  Bottom Layer w20: DY1.12 1634,5465 2765,5465 2842,5388 2842,4947 2775,4880 2618,4880 v1(2566,4828)
NetIC2_1: IC2.1 R6.2 R9.1 | length 643.1
  Top Layer w20: R6.2 1188.21,1451.79 1188.21,1528.21 v1(1190,1530) ; R9.1 1259.63,1775 ; v1(1275,1670) 1230,1715 1230,1745.37 1259.63,1775 ; IC2.1 1350,1700 1275,1775 1259.63,1775
  Bottom Layer w20: v1(1190,1530) 1198.12,1530 1212.01,1543.89 1213.89,1543.89 1275,1605 v1(1275,1670)
NetIC2_2: IC2.2 R7.2 R9.2 | length 385.1
  Top Layer w20: R9.2 1116.83,1771.75 1116.83,1728.17 1188.17,1656.83 1188.17,1611.75 R7.2 1195,1610 1290,1610 IC2.2
NetIC2_6: IC2.6 R12.2 R13.2 | length 1327.1
  Top Layer w20: v1(2195,1695) 2196.39,1696.39 2231.39,1696.39 2250,1715 2250,1760 2235.37,1774.63 2201.79,1774.63 R13.2 ; R12.2 2305,1930 2365,1870 2365,1738.12 2330,1703.12 v1(2330,1695)
  Bottom Layer w20: IC2.6 1830,1450 2075,1695 v1(2195,1695) v1(2330,1695)
NetIC2_7: IC2.7 R8.1 R11.2 | length 887.5
  Top Layer w20: IC2.7 1727.48,1620 R8.1 1796.83,1623.25 1796.83,1666.83 1815,1685 1915,1685 1950,1720 1950,1980 1915,2015 1825,2015 1790,1980 R11.2
NetIC4_1: IC4.1 R4.2 | length 2469.8
  Top Layer w20: R4.2 2600,560 2639.88,520.12 2699.88,520.12 v1(2700,520) ; v1(2852.5,1935) 2852.5,1937.5 3165,2250 3165,2470 3215,2520 IC4.1
  Bottom Layer w20: v1(2700,520) 2750,520 2790,560 2790,1867.22 2852.5,1929.72 v1(2852.5,1935)
NetIC4_2: IC4.2 R20.1 TB4.2 | length 1175.7
  Top Layer w20: IC4.2 3330,2370 3908.19,2370 3938.19,2340 4111.37,2340 4119.4,2331.96 4130.75,2331.96 4132.72,2330 4351,2330 4370,2349 R20.1
NetIC4_7: IC4.7 TB5.1 | length 243.4
  Bottom Layer w20: TB5.1 3170,1900 3195,1925 3275,1925 IC4.7
NetIC4_8: IC4.8 TB5.2 | length 239.3
  Bottom Layer w20: TB5.2 3180,1800 3200,1820 IC4.8
NetIC4_11: IC4.11 R16.2 R17.1 ZD1.1 | length 1591.5
  Top Layer w45: R16.2 2650,1940 ; R17.1 2670,1770 2696.36,1796.36 2696.36,1918.64 2675,1940 2650,1940 ; ZD1.1 2680,1970 2650,1940
  Bottom Layer w20: ZD1.1 2685.67,2139.22 2725.78,2139.22 2775,2090 2845,2090 2960,1975 2960,1685 3038.67,1606.33 3193.67,1606.33 IC4.11
NetIC4_12: IC4.12 TB8.5 | length 271.4
  Bottom Layer w20: TB8.5 3115,1520 3215,1420 IC4.12
NetIC4_13: IC4.13 TB8.4 | length 271.4
  Bottom Layer w20: TB8.4 3150,1320 IC4.13
NetIC4_14: IC4.14 TB8.3 | length 271.4
  Bottom Layer w20: TB8.3 3150,1220 IC4.14
NetIC4_15: IC4.15 TB8.2 | length 271.4
  Bottom Layer w20: TB8.2 3053.43,1216.57 3111,1216.57 3207.57,1120 IC4.15
NetIC4_16: IC4.16 TB8.1 | length 271.4
  Bottom Layer w20: TB8.1 3125,1120 3225,1020 IC4.16
NetIC4_19: IC4.19 R19.2 | length 3361.8
  Top Layer w20: R19.2 1188.92,1942.5 1367.5,1942.5 v1(1370,1945)
  Bottom Layer w20: v1(1370,1945) 1610,1945 1725,2060 2832.57,2060 2897.5,1995.07 2897.5,1057.5 2945,1010 3110,1010 3155,965 3155,770 3205,720 IC4.19
NetIC4_20: IC4.20 TB3.1 | length 1114.9
  Bottom Layer w20: IC4.20 3340,560 TB3.1
NetIC4_21: IC4.21 TB3.2 | length 499.1
  Bottom Layer w20: IC4.21 4330,620 TB3.2
NetIC4_22: IC4.22 TB3.3 | length 523.9
  Bottom Layer w20: IC4.22 3898.3,720 3928.3,690 4300,690 TB3.3
NetIC4_23: IC4.23 TB6.3 | length 229.1
  Top Layer w20: IC4.23 3990,820 4030,860 TB6.3
NetIC4_24: IC4.24 TB6.2 | length 229.1
  Top Layer w20: IC4.24 3985,920 4025,960 TB6.2
NetIC4_27: IC4.27 TB7.1 | length 614.9
  Bottom Layer w20: IC4.27 3898.3,1220 3930.88,1252.57 3933.28,1252.57 3945,1264.29 3945,1435 4060,1550 4145,1550 4190,1505 4190,1455 TB7.1
NetIC4_28: IC4.28 TB7.4 | length 242.8
  Top Layer w20: IC4.28 3888.04,1319.44 3989.57,1319.44 v1(3990.12,1318.89)
  Bottom Layer w20: v1(3990.12,1318.89) 3996.11,1318.89 4025,1290 4048.73,1290 4088.73,1250 TB7.4 ; TB7.4@4078.73,1250 TB7.4@4085,1250
NetIC4_30: IC4.30 TB7.5 | length 277.9
  Top Layer w20: IC4.30 3888.74,1520 3993.74,1415 v1(3995,1415)
  Bottom Layer w20: v1(3995,1415) 4000.74,1409.26 4035.74,1409.26 TB7.5
NetIC4_33: IC4.33 TB9.2 | length 212.5
  Bottom Layer w20: IC4.33 TB9.2
NetIC4_34: IC4.34 TB9.3 | length 212.5
  Bottom Layer w20: IC4.34 TB9.3
NetIC4_35: IC4.35 R25.1 TB15.2 | length 1344.6
  Top Layer w20: IC4.35 3927.48,1980 4215,1980 ; v1(4265,2068) 4265,2030 4215,1980 ; 4313,1980 4215,1980 ; 4315,1980 4350,1980 ; 4351.41,1981.41 4370,2000 R25.1
  Bottom Layer w20: TB15.2 4235,2735 4235,2354.32 4265,2324.32 v1(4265,2068)
NetIC4_36: IC4.36 R24.1 TB15.3 | length 1119.9
  Top Layer w20: IC4.36 4130,2120 4170,2160 4170,2240 4200,2270 v1(4205,2270) 4213.12,2270 4275.83,2207.29 4366.87,2207.29 4369.58,2210 R24.1
  Bottom Layer w20: TB15.3 4130,2500.28 4205,2425.28 v1(4205,2270)
NetIC4_37: IC4.37 TB14.2 | length 1341.3
  Top Layer w20: v1(4075,2960) 4280,2960 4325,3005 4325,3055 TB14.2
  Bottom Layer w20: IC4.37 3790,2317.48 3790,2875 3875,2960 v1(4075,2960)
NetIC4_38: IC4.38 TB14.4 | length 999
  Bottom Layer w20: IC4.38 3837.48,2370 3837.48,2852.48 3885,2900 4085,2900 4130,2945 TB14.4
NetIC4_39: IC4.39 TB14.3 | length 887.3
  Bottom Layer w20: IC4.39 3960,2492.52 3960,2810 4005,2855 4185,2855 4230,2900 TB14.3
NetIC5_17: IC5.17 TB11.2 | length 986.6
  Top Layer w20: IC5.17 2847,4570 2900,4517 3626,4517 TB11.2
NetIC5_18: IC5.18 TB11.3 | length 1089.3
  Top Layer w20: IC5.18 2897,4682 2925,4710 3080,4710 v1(3150,4640)
  Bottom Layer w20: v1(3150,4640) 3272,4518 3727,4518 TB11.3
NetL1_1: L1.1 TB10.2 | length 658
  Bottom Layer w50: TB10.2 500,700 L1.1
NetL1_2: L1.2 TB10.1 | length 740.8
  Bottom Layer w50: TB10.1 373.03,273.03 478.03,273.03 805,600 L1.2
NetL1_3: L1.3 T4.2 | length 250
  Bottom Layer w50: L1.3 T4.2
NetR1_1: R1.1 T1.1 T2.2 T3.2 | length 900
  Top Layer w20: T1.1 1906.65,861.65 1831.65,861.65 1765,795 1765,705 1830,640 T2.2 1837.65,542.35 1859.37,542.35 1861.72,540 2070,540 2090,560 ; T3.2 2075,475 2090,490 2090,560 ; R1.1 2090,560
NetR2_2: R2.2 R4.1 T1.2 | length 991.8
  Top Layer w20: R2.2 2260,679.42 2260,747 2274.26,761.26 2274.26,809.26 v1(2280,815) 2330,865 2545,865 2600,810 R4.1
  Bottom Layer w20: T1.2 2105,815 2155,865 2228.28,865 2278.28,815 v1(2280,815)
NetR3_1: R3.1 T4.1 | length 1255.3
  Top Layer w20: T4.1 1505,705 1505,790 1665,950 v1(1980,950) ; v1(2365,800) 2410,800 2430,780 R3.1
  Bottom Layer w20: v1(1980,950) 2213.64,950 2363.64,800 v1(2365,800)
NetR3_2: R3.2 T2.3 T3.1 | length 869.7
  Top Layer w20: T3.1@2020,380 2318,380 2429,491 2429,604.58 R3.2
  Bottom Layer w20: T2.3 1890,380 T3.1@2020,380
NetR5_1: R5.1 R10.2 R14.2 R15.1 TB13.2 | length 3288.6
  Top Layer w20: TB13.2@346.3,1085 590,1085 795,1290 R5.1 1113.58,1338.58 1139.26,1364.26 1164.26,1364.26 v1(1170,1370) ; v1(1585,1840) 1685,1840 1745,1780 1790,1780 1790,1835 1740,1885 1740,2000 1785,2045 1955,2045 2015,1985 2015,1905 2060,1860 2268.28,1860 2306.72,1821.57 2306.72,1739.29 2281.72,1714.29 2281.72,1663.43 2238.28,1620 R14.2 R15.1
  Bottom Layer w20: v1(1170,1370) 1172.48,1372.48 1205.3,1372.48 1275.16,1442.34 1330.32,1497.5 1364.68,1497.5 1425,1557.82 1425,1597.43 1510,1682.43 1510,1765 v1(1585,1840)
NetR8_2: R8.2 R13.1 | length 323.4
  Top Layer w20: R8.2 1915,1620 2075,1780 R13.1
NetR18_1: R18.1 R19.1 T5.2 | length 688
  Top Layer w20: T5.2 660,1835 870,2045 960,2045 990,2015 R18.1 R19.1
NetRY1_4: RY1.4 RY1.7 TB2.2 | length 2117.8
  Top Layer w50: RY1.7 1055,3239.72 1055,3510 1145,3600 1386.85,3600 RY1.4
  Bottom Layer w50: TB2.2 674.72,2540 RY1.7
NetTB12_5: TB12.5 U1.2 U1.3 U1.4 U1.C | length 2050.3
  Top Layer w20: U1.C 805,6171 805,6090 840.47,6054.53 U1.3 ; U1.4 1008.83,6482.92 1127.08,6482.92 1228.26,6381.74 1263.55,6381.74 U1.2 1373.44,6475 TB12.5
  Bottom Layer w20: U1.3 711.47,6054.53 646,6120 646,6420 721.47,6495.47 U1.4
pads on no net: IC4.3 IC4.4 IC4.25 IC4.26 IC4.40 IC5.10 IC5.11 IC5.19 IC5.20 RY1.5

## Silkscreen, mask and mechanical layers (free items; w line width, h text height)
Top Overlay:
  lines w3.94: 1810,5740 1810,6660 ; 2440,220 2440,420 4310,420 4310,220 2440,220
  lines w10: 5,4245 4805,4245 ; 20,5740 4810,5740
  text "Solderingstation by Aerts Xander" at 2460,339.99 h60
  text "Date: 2023" at 2460,240 h60